# Altium PCB picphlipvfd.PcbDoc
Units mil, origin at the board's own origin, x right, y up, seen from the top; angles counter-clockwise.
Board outline 6000 x 4000 mil, 2 copper layers (Top Layer, Bottom Layer); 80 components, 82 nets, 393 pads, 0 vias.
Unrouted connection lines stored in the file: 236.
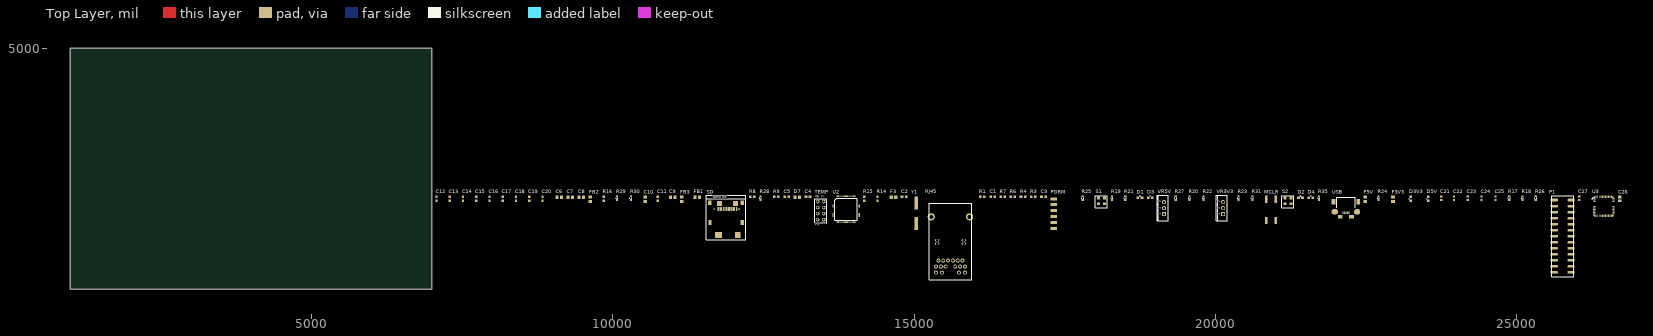
[diagram p0: Top Layer view]
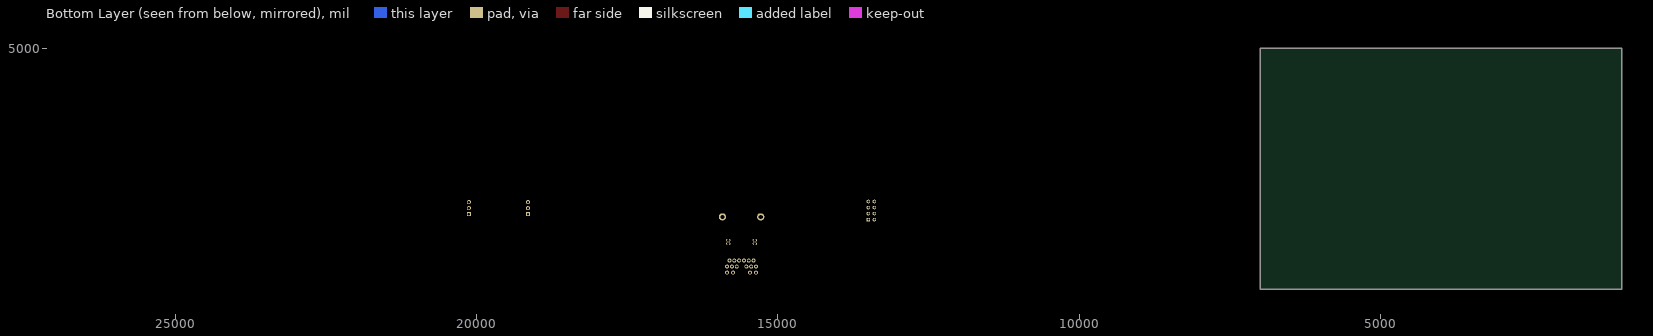
[diagram p1: Bottom Layer view, seen from below]

## Layer stack, top to bottom
Top Layer: signal copper 1.4
Dielectric: dielectric 12.6, FR-4, Dk 4.8
Bottom Layer: signal copper 1.4

## Board outline
1000,1000 7000,1000 7000,5000 1000,5000

## Design rules (kind name [scope] priority, off if disabled: settings)
Clearance [All] p1: gap=10
PolygonConnect [All] p1: connectstyle=Relief reliefconductorwidth=10 reliefentries=4 polygonreliefangle="90 Angle"
RoomDefinition picphlipvfd [InComponentClass('picphlipvfd')] p1: confinementstyle=ConfineIn formatcopy=TRUE lockcomponents=FALSE outline 7045,1065 26870,1065 26870,2670 7045,2670
RoutingVias [All] p1: holewidth=28 width=50 viastyle="Through Hole" minholewidth=28 minwidth=50 maxholewidth=28 maxwidth=50
SilkscreenOverComponentPads [All] p1: minsilkscreentomaskgap=10
SolderMaskExpansion [All] p1: expansion=4
Width [All] p1: maxlimit=10 minlimit=10 preferedwidth=10
27 further rules are at their usual default settings.

## Components (designator, comment, footprint, x,y, rotation, side; value= is the part's Value field where it differs from the comment)
C1 "13p" CAP-0603 16305,2540 r0 top
C2 "13p" CAP-0603 14835,2540 r0 top
C3 "0.1uF" CAP-0603 17150,2540 r0 top
C4 "0.1uF" CAP-0603 13240,2540 r0 top
C5 "0.1uF" CAP-0603 12885,2540 r0 top
C6 "3.3uF/16V" CAP-0805 9110,2530 r0 top
C7 "10uF/16V" CAP-0805 9295,2530 r0 top
C8 "10uF/16V" CAP-0805 9480,2530 r0 top
C9 "10uF/16V" CAP-0805 10995,2530 r0 top
C10 "10uF/16V" CAP-0805 10540,2495 r90 top
C11 "0.01uF" CAP-0603 10750,2505 r90 top
C12 "0.1uF" CAP-0603 7075,2505 r90 top
C13 "0.1uF" CAP-0603 7295,2505 r90 top
C14 "0.1uF" CAP-0603 7515,2505 r90 top
C15 "0.1uF" CAP-0603 7735,2505 r90 top
C16 "0.1uF" CAP-0603 7955,2505 r90 top
C17 "0.1uF" CAP-0603 8175,2505 r90 top
C18 "0.1uF" CAP-0603 8395,2505 r90 top
C19 "0.1uF" CAP-0603 8615,2505 r90 top
C20 "0.1uF" CAP-0603 8835,2505 r90 top
C21 "Cap Semi" 1608[0603] 23750,2515 r90 top
C22 "Cap Semi" 1608[0603] 23960,2515 r90 top
C23 "Cap Semi" 1608[0603] 24190,2515 r90 top
C24 "Cap Semi" 1608[0603] 24420,2515 r90 top
C25 "Cap Semi" 1608[0603] 24650,2515 r90 top
C26 "Taint" C0805 26715,2505 r90 top
C27 "Cap Semi" 1608[0603] 26040,2515 r90 top
D1 "LED1" LED-SMT-0603 18750,2525 r0 top
D2 "LED1" LED-SMT-0603 21415,2525 r0 top
D3 "LED1" LED-SMT-0603 18920,2525 r0 top
D3V3 "LED1" LED-SMT-0603 23245,2505 r90 top
D4 "LED1" LED-SMT-0603 21585,2525 r0 top
D5V "LED1" LED-SMT-0603 23535,2505 r90 top
D7 "Diode" CAP-0805 13060,2530 r0 top
F3 "Fuse 1" INDUCTOR-0805 14660,2530 r0 top
F3V3 "Fuse 1" CAP-0805 22950,2495 r90 top
F5V "Fuse 1" CAP-0805 22490,2495 r90 top
FB1 "1uH" INDUCTOR-0805 11405,2530 r0 top
FB2 "1uH" INDUCTOR-0805 9630,2495 r90 top
FB3 "1uH" INDUCTOR-0805 11145,2495 r90 top
MCLR "SW-PB" SWITCH-TACTILE-SPST-SMT-GULL-NO-KST241GLFS 20925,2320 r90 top
P1 "VFD" HDR13F 25930,230 r90 top
PGRM "PGRM" CONN-HEADER-HOR-SMT-1x6 17320,2010 r90 top
R1 "1M" RES-0603 16135,2540 r0 top
R3 "200" RES-0603 16980,2540 r0 top
R4 "200" RES-0603 16810,2540 r0 top
R6 "49.9" RES-0603 16640,2540 r0 top
R7 "49.9" RES-0603 16470,2540 r0 top
R8 "300 (1%)" CAP-0603 12315,2540 r0 top
R9 "12K (1%)" RES-0603 12715,2540 r0 top
R14 "49.9" RES-0603 14395,2505 r90 top
R15 "49.9" RES-0603 14175,2505 r90 top
R16 "4.7K" RES-0603 9850,2505 r90 top
R17 "Res3" J1-0603 24880,2515 r90 top
R18 "Res3" J1-0603 25100,2515 r90 top
R19 "Res3" J1-0603 18285,2515 r90 top
R20 "Res3" J1-0603 19575,2515 r90 top
R21 "Res3" J1-0603 18505,2515 r90 top
R22 "Res3" J1-0603 19805,2515 r90 top
R23 "Res3" J1-0603 20385,2515 r90 top
R24 "Res3" J1-0603 22710,2515 r90 top
R25 "Res3" J1-0603 17800,2515 r90 top
R26 "Res3" J1-0603 25320,2515 r90 top
R27 "Res3" J1-0603 19345,2515 r90 top
R28 "Res3" J1-0603 12450,2515 r90 top
R29 "Res3" J1-0603 10070,2515 r90 top
R30 "Res3" J1-0603 10300,2515 r90 top
R31 "Res3" J1-0603 20615,2515 r90 top
R35 "Res3" J1-0603 21720,2515 r90 top
RJ45 "RJ113BZ_0" POE 15605,1280 r90 top
S1 "SW-PB" Switch7914 18060,2515 r0 top
S2 "SW-PB" Switch7914 21155,2515 r0 top
SD "SD" MICRO-SD 11755,2335 r0 top
TEMP "Header 4X2" HDR2X4 13500,2160 r90 top
U2 "W5100" Quad80 13655,2480 r0 top
U3 "pic24fj64gb005" QFN-44 26450,2380 r0 top
USB "USB" CONN-USB-MICROB-SMT 22220,2275 r0 top
VR3V3 "3.3V" TO-220 20130,2350 r90 top
VR5V "5V" TO-220 19150,2350 r90 top
Y1 "25MHz (SMD)" XTAL-20MHZ-ATS200-SM 15035,2265 r90 top

## Footprints (in the part's own frame and the unit in brackets; to place one, negate y for a bottom-side part, rotate by r counter-clockwise, add the part's x,y. Pads: shape width x height; smd on the part's side, far side on the other; paste and mask are expansions set on the pad)
1608[0603] [mm] "Chip Capacitor, Body 1.6x0.8mm, IPC High Density"
  rect 0.8x0.9 smd: 1(-0.7,0) 2(0.7,0)
  body extent -0.87,-0.48 0.87,0.48, height 1.3
C0805 [mm] "Chip Capacitor, Body 2.0x1.3mm, IPC High Density"
  rect 1.1x1.4 smd: 1(-0.75,0) 2(0.75,0)
  body extent -1.1,-0.72 1.1,0.72, height 1.4
CAP-0603 [mm]
  rect 1.1x1 smd: 1(-0.85,0) 2(0.85,0)
  body extent -0.8,-0.43 0.8,0.43, height 0.88
CAP-0805 [mm]
  rect 1.3x1.5 smd: 1(-0.95,0) 2(0.95,0)
  body extent -1,-0.65 1,0.66, height 0.78
CONN-HEADER-HOR-SMT-1x6 [mm]
  rect 1.3x2.8 smd: 1(0,0) 2(2.54,0) 3(5.08,0) 4(7.62,0) 5(10.16,0) 6(12.57,0)
  body extent -1.27,-10.23 13.97,0.87, height 2.52
CONN-USB-MICROB-SMT [mm]
  rect 0.4x1.05 smd: 1(0,0) 2(-0.65,0) 3(-1.3,0) 4(-1.95,0) 5(-2.6,0)
  rect 2x1.5 smd: 6(1.05,-1.775) 7(-3.65,-1.775)
  oct 2.55x2.4 smd: 8(3.425,0.325) 9(-6.025,0.325)
  rect 1.6x2.4 smd: 10(3.9,4.625) 11(-6.5,4.625)
  silkscreen extent -5.2,2 2.6,6.53, body extent -7.05,-2.03 4.45,7.26, height 1.56
HDR2X4 [mm] "Connector; Header; 4x2 Position"
  rect 1.5x1.5 hole 0.9: 1(0,0)
  round 1.5 hole 0.9: 2(0,2.54) 3(2.54,0) 4(2.54,2.54) 5(5.08,0) 6(5.08,2.54) 7(7.62,0) 8(7.62,2.54)
  silkscreen extent -1.27,-1.27 8.89,3.81
HDR13F [mil]
  rrect50% 42x120 smd mask+3: 1(2255,305) 2(2255,25) 3(2155,305) 4(2155,25) 5(2055,305) 6(2055,25) 7(1955,305) 8(1955,25) 9(1855,305) 10(1855,25) 11(1755,305) 12(1755,25) 13(1655,305) 14(1655,25) 15(1555,305) 16(1555,25) 17(1455,305) 18(1455,25) 19(1355,305) 20(1355,25) 21(1255,305) 22(1255,25) 23(1155,305) 24(1155,25) 25(1055,305) 26(1055,25)
  round 0 hole 55 unplated: 25(2155,215) 26(2155,115) 27(2055,215) 28(2055,115) 29(1955,215) 30(1955,115) 31(1855,215) 32(1855,115) 33(1755,215) 34(1755,115) 35(1655,215) 36(1655,115) 37(1555,215) 38(1555,115) 39(1455,215) 40(1455,115) 41(1355,215) 42(1355,115) 43(1255,215) 44(1255,115) 45(1155,215) 46(1155,115) 47(1055,215) 48(1055,115) 49(2255,115) 50(2255,215)
  silkscreen extent 985,-16 2325,346
INDUCTOR-0805 [mm]
  rect 1.3x1.5 smd: 1(-0.95,0) 2(0.95,0)
  body extent -1,-0.65 1,0.66, height 0.78
J1-0603 [mm] "Chip Resistor, Body 1.6x0.8mm, IPC High Density"
  rect 0.7x0.9 smd: 1(-0.75,0) 2(0.75,0)
  silkscreen extent -0.2,-0.35 0.2,0.35, body extent -0.85,-0.48 0.85,0.48, height 0.9
LED-SMT-0603 [mm]
  rect 1.1x1 smd: 1(-0.85,0) 2(0.85,0)
  silkscreen extent -0.08,0.52 0.08,0.82, body extent -0.8,-0.41 0.8,0.45, height 0.75
MICRO-SD [mm]
  rect 0.8x1.8 smd: 1(0,0) 2(1.1,0) 3(2.2,0) 4(3.3,0) 5(4.4,0) 6(5.5,0) 7(6.6,0) 8(7.7,0)
  rect 1.45x2 smd: 9(-3.6,2.6) 12(10,2.6) 13(-3.581,-5.715) 14(9.982,-5.69)
  rect 2.05x2 smd: 10(0.483,2.3) 11(7.239,2.3)
  rect 3x2.45 smd: 15(-0.025,-10.922)
  rect 2.25x2.45 smd: 16(8.153,-10.947)
  silkscreen extent -5.08,-12.98 11.4,5.71
POE [mil]
  round 65 hole 38: 1(200,200) 2(200,120) 3(200,40) 4(200,-40) 5(200,-120) 6(200,-200) 7(100,240) 8(100,160) 9(100,80) 10(100,-80) 11(100,-160) 12(100,-240) 13(0,240) 14(0,140) 15(0,-140) 16(0,-240)
  round 0 hole 130 unplated: 26(800,250) 27(800,-250)
  round 120 hole 70: 28(925,317.5) 29(925,-317.5)
  oval 45x70 hole 38: P1(480,220) P2(480,-220) P3(538,220) P4(538,-220)
  silkscreen extent -115,-350 1150,350
QFN-44 [mm]
  oval 1x0.35 smd: 1(-4.025,3.25) 2(-4.025,2.6) 3(-4.025,1.95) 4(-4.025,1.3) 5(-4.025,0.65) 6(-4.025,0) 7(-4.025,-0.65) 8(-4.025,-1.3) 9(-4.025,-1.95) 10(-4.025,-2.6) 11(-4.025,-3.25) 23(4.025,-3.25) 24(4.025,-2.6) 25(4.025,-1.95) 26(4.025,-1.3) 27(4.025,-0.65) 28(4.025,0) 29(4.025,0.65) 30(4.025,1.3) 31(4.025,1.95) 32(4.025,2.6) 33(4.025,3.25)
  oval 0.35x1 smd: 12(-3.25,-4.025) 13(-2.6,-4.025) 14(-1.95,-4.025) 15(-1.3,-4.025) 16(-0.65,-4.025) 17(0,-4.025) 18(0.65,-4.025) 19(1.3,-4.025) 20(1.95,-4.025) 21(2.6,-4.025) 22(3.25,-4.025) 34(3.25,4.025) 35(2.6,4.025) 36(1.95,4.025) 37(1.3,4.025) 38(0.65,4.025) 39(0,4.025) 40(-0.65,4.025) 41(-1.3,4.025) 42(-1.95,4.025) 43(-2.6,4.025) 44(-3.25,4.025)
  silkscreen extent -5.02,-4 4,4, body extent -4,-4 4,4, height 0.9
Quad80 [mm]
  oval 0.6x0.16 smd: 1(0,0)
  rect 0.6x0.16 smd: 2(0,-0.4) 3(0,-0.8) 4(0,-1.2) 5(0,-1.6) 6(0,-2) 7(0,-2.4) 8(0,-2.8) 9(0,-3.2) 10(0,-3.6) 11(0,-4) 12(0,-4.4) 13(0,-4.8) 14(0,-5.2) 15(0,-5.6) 16(0,-6) 17(0,-6.4) 18(0,-6.8) 19(0,-7.2) 20(0,-7.6) 41(11,-7.6) 42(11,-7.2) 43(11,-6.8) 44(11,-6.4) 45(11,-6) 46(11,-5.6) 47(11,-5.2) 48(11,-4.8) 49(11,-4.4) 50(11,-4) 51(11,-3.6) 52(11,-3.2) 53(11,-2.8) 54(11,-2.4) 55(11,-2) 56(11,-1.6) 57(11,-1.2) 58(11,-0.8) 59(11,-0.4) 60(11,0)
  rect 0.16x0.6 smd: 21(1.7,-9.3) 22(2.1,-9.3) 23(2.5,-9.3) 24(2.9,-9.3) 25(3.3,-9.3) 26(3.7,-9.3) 27(4.1,-9.3) 28(4.5,-9.3) 29(4.9,-9.3) 30(5.3,-9.3) 31(5.7,-9.3) 32(6.1,-9.3) 33(6.5,-9.3) 34(6.9,-9.3) 35(7.3,-9.3) 36(7.7,-9.3) 37(8.1,-9.3) 38(8.5,-9.3) 39(8.9,-9.3) 40(9.3,-9.3) 61(9.3,1.7) 62(8.9,1.7) 63(8.5,1.7) 64(8.1,1.7) 65(7.7,1.7) 66(7.3,1.7) 67(6.9,1.7) 68(6.5,1.7) 69(6.1,1.7) 70(5.7,1.7) 71(5.3,1.7) 72(4.9,1.7) 73(4.5,1.7) 74(4.1,1.7) 75(3.7,1.7) 76(3.3,1.7) 77(2.9,1.7) 78(2.5,1.7) 79(2.1,1.7) 80(1.7,1.7)
  silkscreen extent 0.84,-8.46 10.16,0.87
RES-0603 [mm]
  rect 1.1x1 smd: 1(-0.85,0) 2(0.85,0)
  body extent -0.8,-0.41 0.8,0.45, height 0.53
Switch7914 [mil]
  rect 49x49 smd: 1(0,-92) 1(0,0) 2(100,-92) 2(100,0)
  silkscreen extent -49,-160 148,44
SWITCH-TACTILE-SPST-SMT-GULL-NO-KST241GLFS [mm]
  rect 3.1x1 smd: 1(-4.45,2) 1(4.45,2) 2(-4.45,-2) 2(4.45,-2)
  body extent -3.18,-3.18 3.18,3.18, height 5.2
TO-220 [mm]
  rect 1.7x1.7 hole 1: 1(-2.54,0)
  round 1.7 hole 1: 2(0,0) 3(2.54,0)
  silkscreen extent -5.35,-1.85 5.35,2.85, body extent -5.08,-1.79 5.08,3.01, height 19.1
XTAL-20MHZ-ATS200-SM [mil]
  rect 217x59 smd: 1(-167.5,0) 2(167.5,0)
  body extent -295,-89 295,89, height 201

## Part data
C1 C2 C3 C4 C5 C12 C13 C14 C15 C16 C17 C18 C19 C20: library part "CAP NP"
C6 C7 C8 C9 C10: library part CAP_4.7uF_B
C11: library part CAP_0.01uF_0603
C21 C22 C23 C24 C25 C27: "Capacitor (Semiconductor SIM Model)"
C26: library part "Cap Pol3", "Polarized Capacitor (Surface Mount)"
D1 D2 D3 D3V3 D4 D5V: "Typical RED GaAs LED"
D7: "Default Diode"
F3 F3V3 F5V: "Fuse"
FB1 FB2 FB3: library part FB_0805
MCLR S1 S2: "Switch"
P1: library part "Header 13X2", "Header, 13-Pin, Dual row"
PGRM: library part MHDR1X6, "Header, 6-Pin"
R1 R8 R9: library part R_Dup1
R3 R4 R6 R7 R14 R15 R16: library part R
R17 R18 R19 R20 R21 R22 R23 R24 R25 R26 R27 R28 R29 R30 R31 R35: "Resistor"
SD: library part MHDR1X7, "Header, 7-Pin"
TEMP: "Header, 4-Pin, Dual row"
U2: library part W5100_7
U3: library part pic24fj64gb108-x, "Imported"
USB: library part MHDR1X4, "Header, 4-Pin"
VR3V3 VR5V: library part "Volt Reg", "Voltage Regulator"
Y1: library part CRYSTAL

## Nets (pads, with @x,y where several pads share a name; then routed paths per layer and width w, separated by ;. In a path a pad name is that pad's centre, name@x,y a point inside that pad or via, vN(x,y) a via of type N, cw(c..) or ccw(c..) an arc to the next point about the centre after c; other vN are vias at no path point)
1V8_OUT: C6.1 C7.1 C12.1 C13.1 C14.1 C15.1 FB2.1 U2.11 U2.15 U2.16 U2.33 U2.69
1V8A: C8.1 C16.1 C17.1 FB2.2 U2.7 U2.74
3V3A: C4.1 C10.1 C11.1 FB3.2 RJ45.1 RJ45.6 RJ45.7 RJ45.12 U2.2
3V3D: C9.1 C18.1 C19.1 C20.1 C21.2 C22.2 C23.2 C24.2 C25.2 C26.1 F3V3.2 FB3.1 PGRM.2 R3.2 R4.2 R16.1 R17.1 R24.2 R25.2 R26.2 R28.2 R29.1 R30.1 R31.2 SD.3 TEMP.8 U2.12 U2.18 U2.44 U3.10 U3.17 U3.28 U3.40
5V: F5V.2 R18.1 VR3V3.1
9V: F3.2 VR5V.1
/CS: U2.55
/INT: U2.56
/RESET: PGRM.1 R23.1 U2.59 U3.18
/SCS: R26.1 U2.29 U3.36
/WR: U2.57
D0: U2.26
D1: U2.25
D2: U2.24
D3: U2.23
D4: U2.22
D5: U2.21
D6: U2.20
D7: U2.19
FDX_LED: RJ45.13 U2.70
GND: C1.2 C2.2 C6.2 C7.2 C9.2 C10.2 C11.2 C12.2 C13.2 C14.2 C15.2 C18.2 C19.2 C20.2 C21.1 C22.1 C23.1 C24.1 C25.1 C26.2 C27.1 D1.2 D2.2 D3.2 D3V3.2 D4.2 D5V.2 D7.1 FB1.2 MCLR.2 P1.4 P1.6 P1.8 P1.10 P1.12 P1.14 P1.16 P1.18 P1.20 P1.22 P1.24 P1.26 PGRM.3 R27.1 SD.5 TEMP.4 U2.13 U2.14 U2.17 U2.32 U2.34 U2.35 U2.36 U2.37 U2.38 U2.39 U2.40 U2.41 U2.42 U2.43 U2.45 U2.46 U2.47 U2.48 U2.49 U2.50 U2.51 U2.52 U2.53 U2.54 U2.63 U2.64 U2.65 U2.68 U3.16 U3.29 U3.39 USB.4 VR3V3.2 VR5V.2
GNDA: C3.1 C4.2 C5.2 C8.2 C16.2 C17.2 FB1.1 R8.1 U2.4 U2.10 U2.77
LINK_LED: RJ45.15 U2.66
MISO: R28.1 SD.6 TEMP.1 U2.27 U3.27
MOSI: R30.2 SD.2 U2.28 U3.26
NetC3_2: C3.2 R6.2 R7.2
NetC5_1: C5.1 R14.1 R15.1
NetC27_2: C27.2 U3.7
NetD1_1: D1.1 R19.2
NetD2_1: D2.1 R20.2
NetD3_1: D3.1 R21.2
NetD3V3_1: D3V3.1 R17.2
NetD4_1: D4.1 R22.2
NetD5V_1: D5V.1 R18.2
NetD7_2: D7.2 RJ45.P4
NetF3_1: F3.1 RJ45.P3
NetF3V3_1: F3V3.1 VR3V3.3
NetF5V_1: F5V.1 VR5V.3
NetMCLR_1: MCLR.1 R23.2 R24.1
NetP1_3: P1.3 U3.13
NetP1_7: P1.7 U3.32
NetP1_9: P1.9 U3.35
NetP1_11: P1.11 U3.1
NetP1_13: P1.13 U3.2
NetP1_15: P1.15 U3.3
NetP1_17: P1.17 U3.4
NetP1_19: P1.19 U3.5
NetP1_21: P1.21 U3.43
NetP1_23: P1.23 U3.41
NetP1_25: P1.25 U3.12
NetPGRM_4: PGRM.4 U3.21
NetPGRM_5: PGRM.5 U3.22
NetR3_1: R3.1 RJ45.14
NetR4_1: R4.1 RJ45.16
NetR8_2: R8.2 R9.1
NetR19_1: R19.1 U3.33
NetR20_1: R20.1 U3.44
NetR21_1: R21.1 U3.20
NetR22_1: R22.1 U3.19
NetR25_1: R25.1 S1.2
NetR27_2: R27.2 R35.1 U3.42
NetR29_2: R29.2 SD.1 U3.25
NetR31_1: R31.1 S2.2
NetR35_2: R35.2 USB.1
NetS1_1: S1.1 U3.23
NetS2_1: S2.1 U3.11
NetTEMP_7: TEMP.7 U3.24
NetU3_8: U3.8 USB.2
NetU3_9: U3.9 USB.3
NetU3_30: U3.30
NetU3_31: U3.31
NetU3_34: U3.34
NetU3_38: U3.38
RSET_BG: R9.2 U2.1
RXIN: R14.2 RJ45.5 U2.6
RXIP: R15.2 RJ45.4 U2.5
SCLK: SD.4 TEMP.2 U2.30 U3.37
SPI_EN: R16.2 U2.31
TXON: R7.1 RJ45.10 U2.9
TXOP: R6.1 RJ45.11 U2.8
XTLN: C2.1 R1.1 U2.75 Y1.2
XTLP: C1.1 R1.2 U2.76 Y1.1
pads on no net: P1.1 P1.2 P1.5 P1.27 P1.28 P1.29 P1.30 P1.31 P1.32 P1.33 P1.34 P1.35 P1.36 P1.37 P1.38 P1.39 P1.40 P1.41 P1.42 P1.43 P1.44 P1.45 P1.46 P1.47 P1.48 P1.49 P1.50 PGRM.6 RJ45.2 RJ45.3 RJ45.8 RJ45.9 RJ45.26 RJ45.27 RJ45.28 RJ45.29 RJ45.P1 RJ45.P2 SD.7 SD.8 SD.9 SD.10 SD.11 SD.12 SD.13 SD.14 SD.15 SD.16 TEMP.3 TEMP.5 TEMP.6 U2.3 U2.58 U2.60 U2.61 U2.62 U2.67 U2.71 U2.72 U2.73 U2.78 U2.79 U2.80 U3.6 U3.14 U3.15 USB.5 USB.6 USB.7 USB.8 USB.9 USB.10 USB.11

## Text inside footprints (layer, text, board x,y; h text height)
P1: Mechanical 1 "J1" at 25532,1817.43 h30 r270
SD: Top Overlay "SD CARD" at 11891,2549 h35 r180; Top Overlay "8" at 12113,2352 h35 r180; Top Overlay "1" at 11703,2352 h35 r180
TEMP: Top Overlay "2" at 13420,2060 h50 r90; Top Overlay "1" at 13520,2080 h50 r90; Top Overlay "7" at 13520,2520 h50 r90; Top Overlay "8" at 13420,2520 h50 r90
VR3V3: Top Overlay "3" at 20074.58,2449 h20 r90; Top Overlay "2" at 20077.44,2341.14 h20 r90; Top Overlay "1" at 20079.19,2241.32 h20 r90
VR5V: Top Overlay "3" at 19094.58,2449 h20 r90; Top Overlay "2" at 19097.44,2341.14 h20 r90; Top Overlay "1" at 19099.19,2241.32 h20 r90